# Altium PCB LED_Indicator.PcbDoc
Units mm, origin at the board's own origin, x right, y up, seen from the top; angles counter-clockwise.
Board outline 10.05 x 16.04 mm, 2 copper layers (Top Layer, Bottom Layer); 3 components, 3 nets, 7 pads, 0 vias.
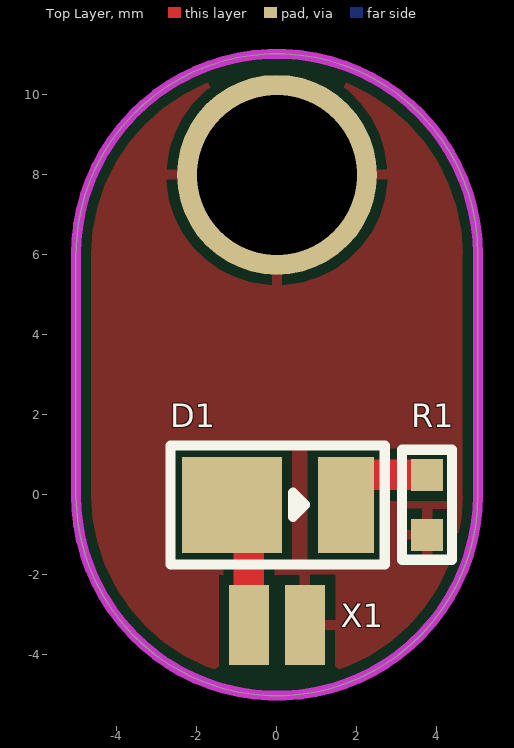
[diagram p0: Top Layer view]
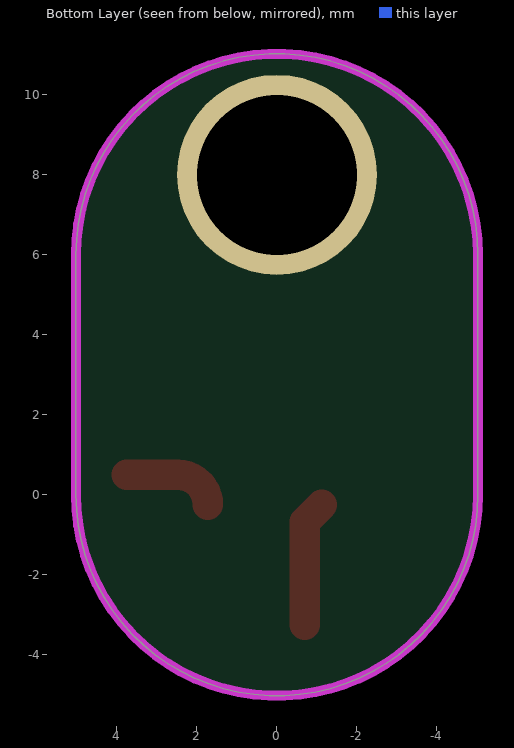
[diagram p1: Bottom Layer view, seen from below]

## Layer stack, top to bottom
Top Solder: solder mask 0.0102, Solder Resist, Dk 3.5
Top Layer: signal copper 0.0356
Dielectric 1: dielectric 0.32, FR-4, Dk 4.8
Bottom Layer: signal copper 0.0356
Bottom Solder: solder mask 0.0102, Solder Resist, Dk 3.5

## Board outline
-5.025,0 ccw(c0,0) 5.025,0 5.025,6 ccw(c0,6) -5.025,6

## Design rules (kind name [scope] priority, off if disabled: settings)
Clearance [All] p1: gap=0.254 ignorepadtopadclearanceinfootprint=FALSE except(0: Arc-Hole Track-Hole SMDPad-Hole THPad-Hole Via-Hole Fill-Hole Poly-Hole Region-Hole Text-Hole)
PolygonConnect [All] p1: connectstyle=Relief reliefconductorwidth=0.254 reliefentries=4 polygonreliefangle="90 Angle" airgapwidth=0.254
RoutingVias [All] p1: holewidth=0.711 width=1.27 viastyle="Through Hole" minholewidth=0.711 minwidth=1.27 maxholewidth=0.711 maxwidth=1.27
SilkToSilkClearance [All] p1: silktosilkclearance=0.127
SilkToSolderMaskClearance [IsPad] p1: minsilkscreentomaskgap=0.127 clearancetoexposedcopper=TRUE
SolderMaskExpansion [All] p1: expansion=0.102 istentingtop=FALSE
Width [All] p1: maxlimit=0.762 minlimit=0.254 preferedwidth=0.508
28 further rules are at their usual default settings.

## Components (designator, comment, footprint, x,y, rotation, side; value= is the part's Value field where it differs from the comment)
D1 "?" LED_2835 0,-0.25 r0 top
R1 "Resistor" RES_0603 3.75,-0.25 r90 top
X1 "?" PAD_SMD_X2 0,-3.25 r180 top

## Footprints (in the part's own frame and the unit in brackets; to place one, negate y for a bottom-side part, rotate by r counter-clockwise, add the part's x,y. Pads: shape width x height; smd on the part's side, far side on the other; paste and mask are expansions set on the pad)
LED_2835 [mm]
  rect 2.5x2.4 smd: 1(-1.125,0)
  rect 1.4x2.4 smd: 2(1.725,0)
  silkscreen extent -2.66,-1.49 2.69,1.48, body extent -1.76,-1.4 1.76,1.4, height 0.72
PAD_SMD_X2 [mm]
  rect 1x2 smd: 1(-0.7,0) 2(0.7,0)
RES_0603 [mm]
  rect 0.8x0.8 smd: 1(-0.75,0) 2(0.75,0)
  silkscreen extent -1.38,-0.63 1.38,0.63, body extent -0.85,-0.4 0.85,0.4, height 0.56

## Part data
D1: library part "Diode LED"
R1: Resistance=?
X1: library part "Double connector"

## Free pads (board coordinates)
  round 5 hole 4: MH(0,8)

## Nets (pads, with @x,y where several pads share a name; then routed paths per layer and width w, separated by ;. In a path a pad name is that pad's centre, name@x,y a point inside that pad or via, vN(x,y) a via of type N, cw(c..) or ccw(c..) an arc to the next point about the centre after c; other vN are vias at no path point)
NetD1_1: D1.1 X1.2 | length 3.2
  Top Layer w0.762: D1.1 -0.7,-0.675 X1.2
NetD1_2: D1.2 R1.2 | length 2.5
  Top Layer w0.762: D1.2 cw(c2.475,-0.25) 2.475,0.5 R1.2
NetR1_1: pad.MH R1.1 X1.1

## Polygon pours and split planes (outlines as drawn)
NetR1_1 on Top Layer "NETR1_1_L01_P000" (solid, remove dead copper, pour order 0): -5.025,0 ccw(c0,0) 5.025,0 5.025,6 ccw(c0,6) -5.025,6

## Keep-outs
Keep-Out Layer:
  the board outline again, w0.254